# EAGLE board adapter (EAGLE 9.1.1)
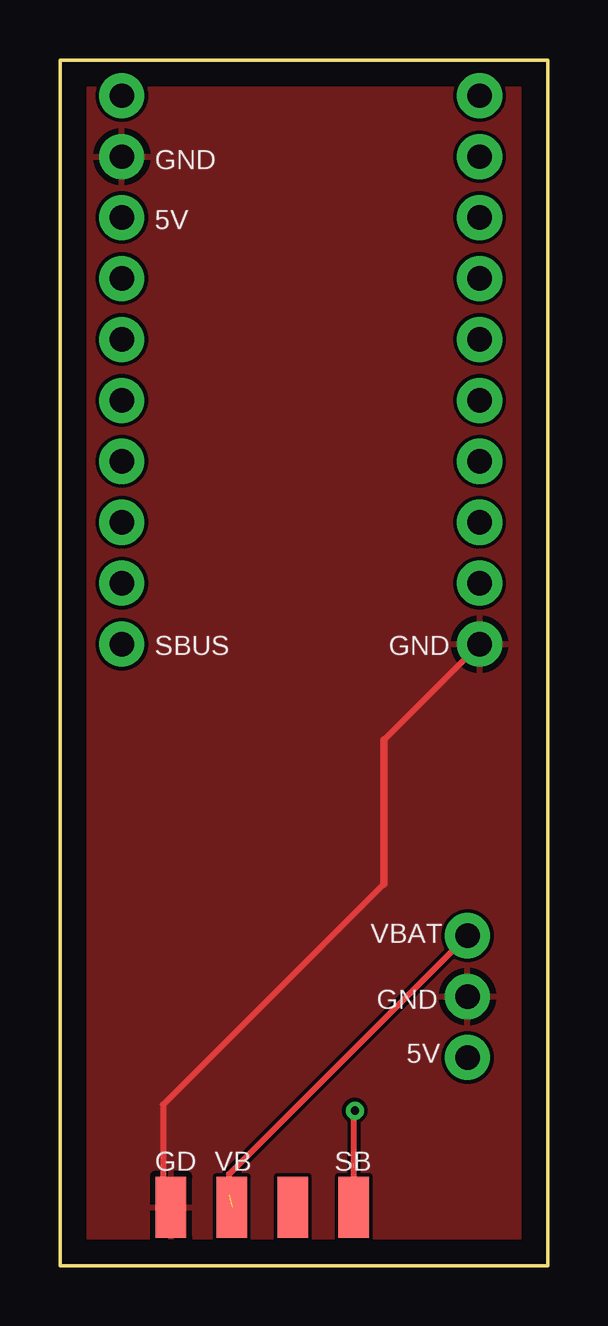
[diagram p0: board, top side]
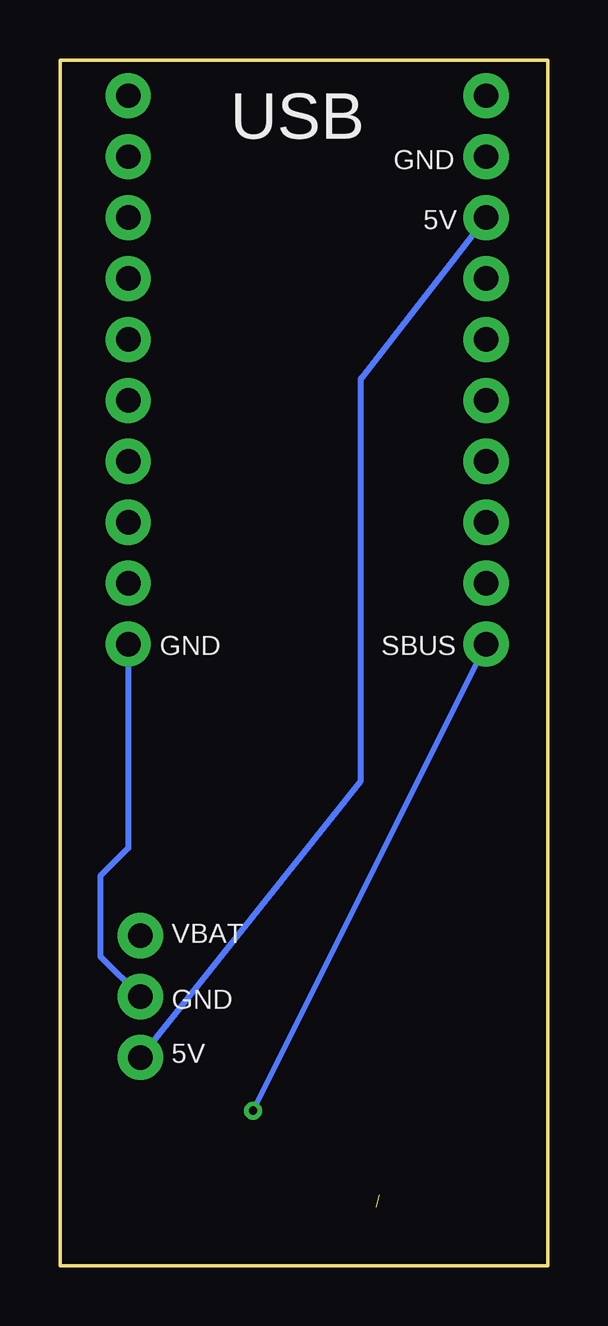
[diagram p1: board, bottom side, seen from below]

Size 20.35 x 50.26 mm. Coordinates in mm from the lower left corner, seen from the top.
Outline: 0,50.26 20.35,50.26 20.35,0 0,0 0,50.26
Copper layers (1*16): Top 0.035mm / dielectric 1.5mm / Bottom 0.035mm
Design rules "default": minimum track width 6mil, minimum drill 0.35mm, track to track 6mil, track to pad 6mil, pad to pad 6mil, via to via 6mil, smd to smd 6mil, copper to edge 40mil, drill to drill 6mil, minimum pad ring 10mil, minimum via ring 8mil, stop-mask expansion 4mil, vias tented up to drill 0mil, thermal gap 10mil

## Footprints (pad centres in the part's own frame; a part is rotated, then mirrored left to right if it is on the bottom)
SMD1,27-2,54 = smd 1.27 x 2.54: 1 0,0
1X10_NO_SILK = drill 1.016 pad 1.88: 1 0,0; 2 2.54,0; 3 5.08,0; 4 7.62,0; 5 10.16,0; 6 12.7,0; 7 15.24,0; 8 17.78,0; 9 20.32,0; 10 22.86,0
1X03_NO_SILK = drill 1.016 pad 1.88: 1 0,0; 2 2.54,0; 3 5.08,0

## Placement (x,y rotation side)
GND  [SMD1,27-2,54]  4.63,2.44 0 top
J1  [1X10_NO_SILK]  17.5,25.91 90 bottom
J2  [1X10_NO_SILK]  2.58,25.91 90 bottom
J3  [1X03_NO_SILK]  17,8.68 90 top
PAD1  [SMD1,27-2,54]  9.71,2.44 0 top
SBUS  [SMD1,27-2,54]  12.25,2.44 0 top
VBAT  [SMD1,27-2,54]  7.17,2.44 0 top

## Library data of the parts
GND PAD1 SBUS VBAT = wirepad
J1-J3 = SparkFun-Connectors

## Nets
3V3: J1.4
5V: J2.8 J3.1
GND: GND.1 J1.1 J2.9 J3.2
M2: J1.9
M3: J1.8
SBUS: J2.1 SBUS.1
VBAT: J3.3 VBAT.1

## Tracks (layer width: path | path; a pad name or v marks a point on that pad's centre or on a via)
5V
  Bottom 0.254: J3.1 7.8,20.21 7.8,36.96 J2.8
GND
  Top 0.152: 4.3,2.77 GND.1
  Top 0.254: 13.5,15.91 4.3,6.71 4.3,2.77 | J1.1 13.5,21.91
  Top 0.305: 13.5,21.91 13.5,15.91
  Bottom 0.254: J1.1 17.5,17.41 18.66,16.24 18.66,12.89 J3.2
  pour Top: -0.85,51.16 21.95,51.16 21.95,-1 -0.85,-1
SBUS  (via drill 0.35)
  Top 0.152: 12.25,6.66 12.3,6.71 v12.3,6.46
  Top 0.254: SBUS.1 12.25,6.66
  Bottom 0.254: v12.3,6.46 J2.1
VBAT  (1 unrouted)
  Top 0.254: J3.3 7.05,3.81 7.05,2.96

## Text on the board
tNames: GND | 5V | SBUS | GND | VBAT | GND | 5V | GD | VB | SB
bNames: USB | GND | 5V | SBUS | GND | VBAT | GND | 5V